# Altium PCB PERSEUS_PCB.PcbDoc
Units mm, origin at the board's own origin, x right, y up, seen from the top; angles counter-clockwise.
Board outline 152.4 x 101.6 mm, 2 copper layers (Top Layer, Bottom Layer); 178 components, 84 nets, 490 pads, 0 vias.
Unrouted connection lines stored in the file: 373.
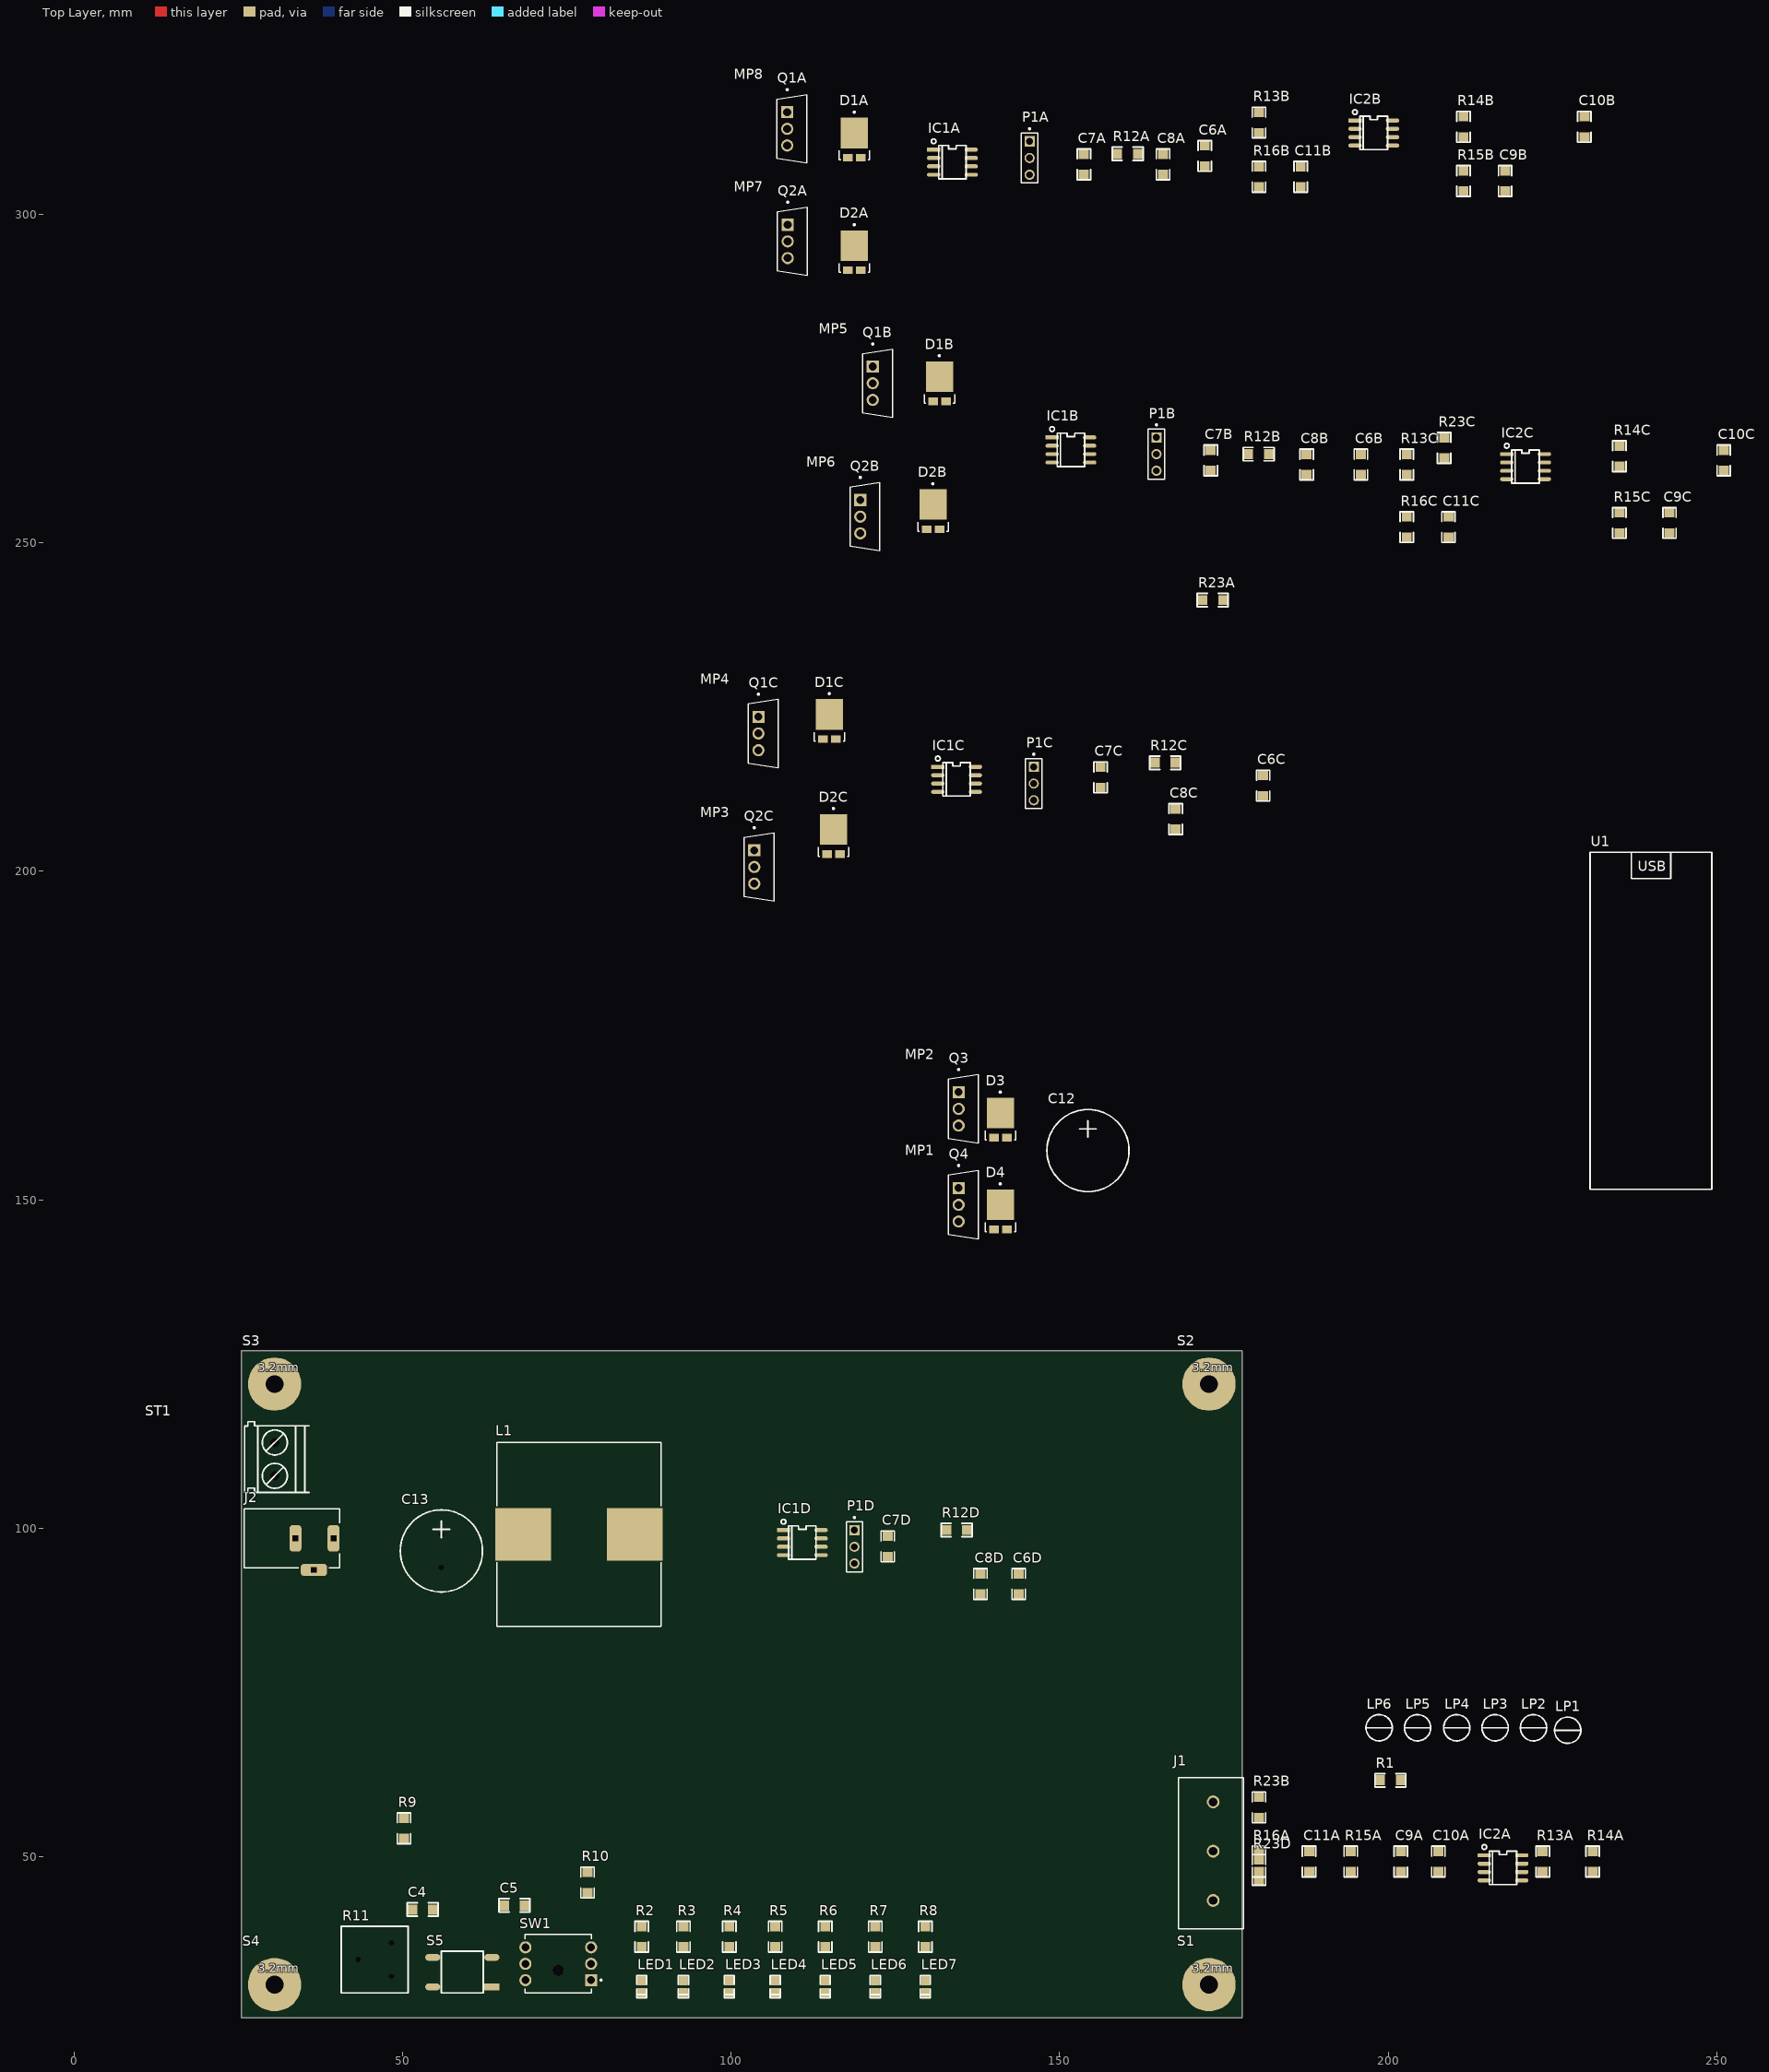
[diagram p0: Top Layer view]
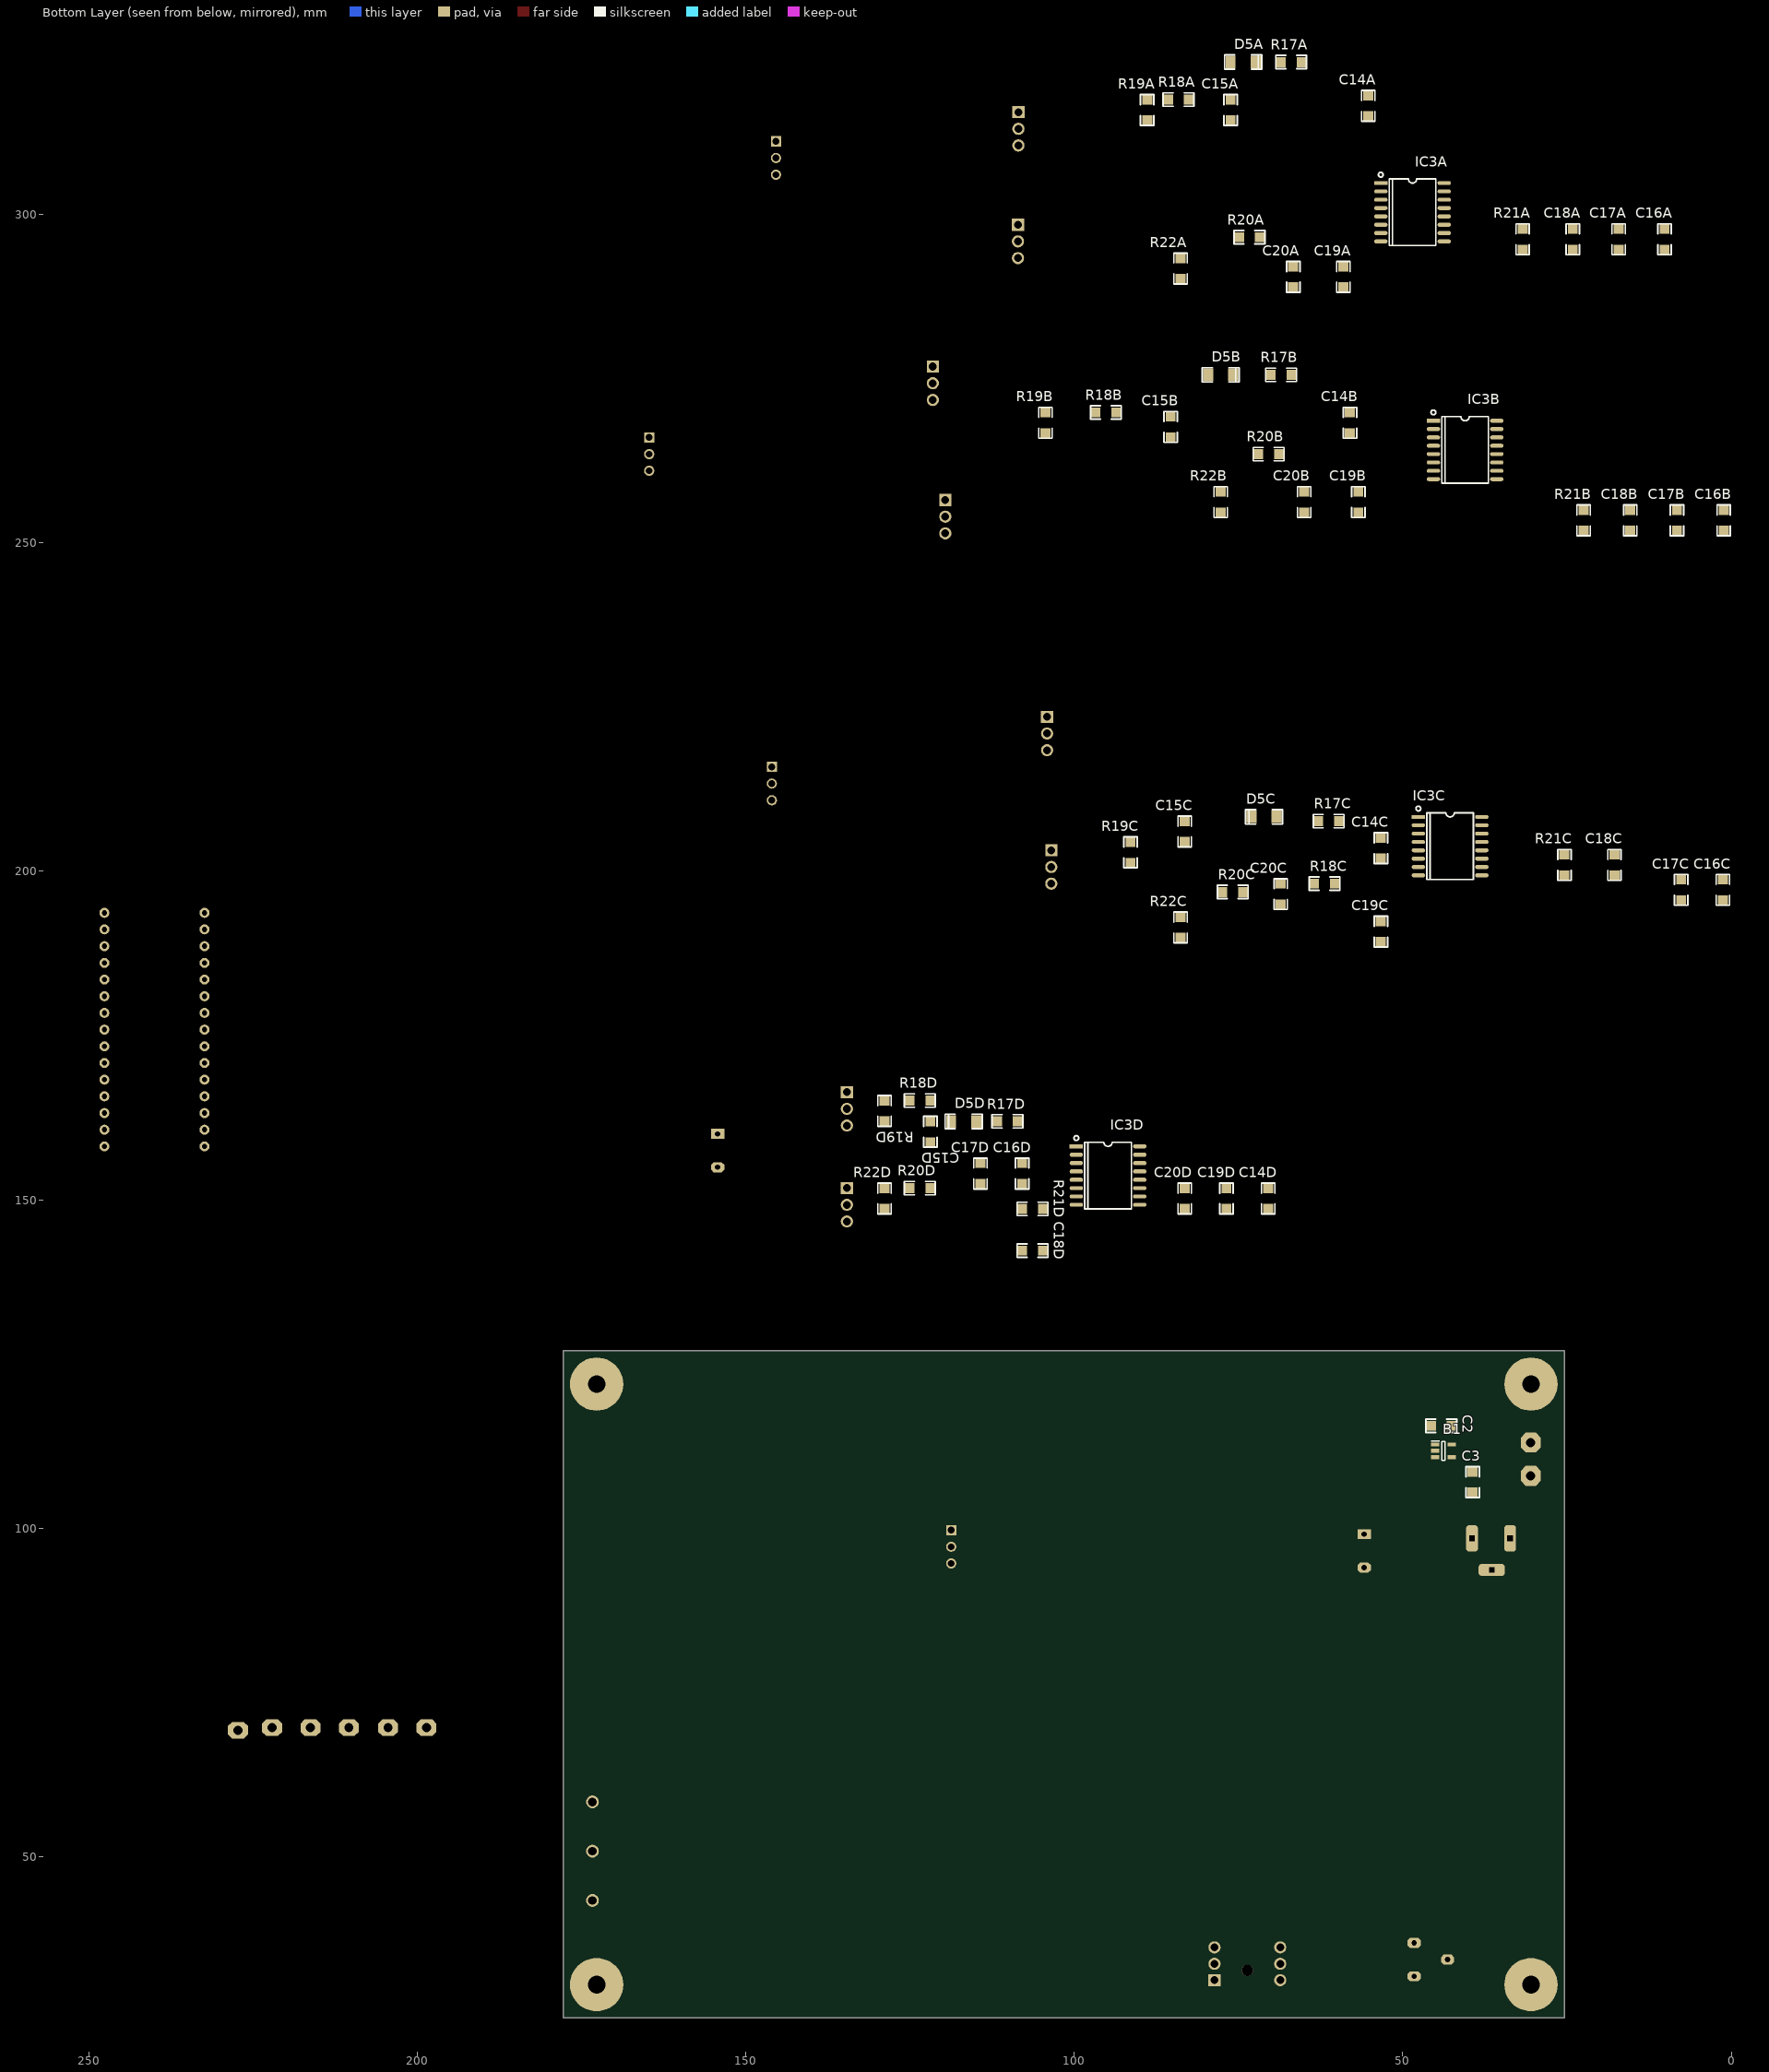
[diagram p1: Bottom Layer view, seen from below]

## Layer stack, top to bottom
Top Solder: solder mask 0.0102, Solder Resist, Dk 3.5
Top Layer: signal copper 0.0356
Dielectric 1: dielectric 0.32, FR-4, Dk 4.8
Bottom Layer: signal copper 0.0356
Bottom Solder: solder mask 0.0102, Solder Resist, Dk 3.5

## Board outline
25.4,25.4 177.8,25.4 177.8,127 25.4,127

## Design rules (kind name [scope] priority, off if disabled: settings)
Clearance [All] p1: gap=0.254 ignorepadtopadclearanceinfootprint=FALSE
ComponentClearance [All] p1 off: gap=0.254 collisioncheckmode=3 verticalgap=0.254 showdistances=FALSE
PolygonConnect [All] p1: connectstyle=Relief reliefconductorwidth=0.254 reliefentries=4 polygonreliefangle="90 Angle" airgapwidth=0.254
RoutingVias [All] p1: holewidth=0.711 width=1.27 viastyle="Through Hole" minholewidth=0.711 minwidth=1.27 maxholewidth=0.711 maxwidth=1.27
SolderMaskExpansion [All] p1: expansion=0.102 istentingtop=FALSE
SupplyNets "Schematic Supply Nets_3" [InNet('+3V3')] p1: voltage=0.000
SupplyNets "Schematic Supply Nets_2" [InNet('GNDA')] p2: voltage=0.000
SupplyNets "Schematic Supply Nets_1" [InNet('SGNDA')] p3: voltage=0.000
SupplyNets "Schematic Supply Nets" [InNet('Uin')] p4: voltage=0.000
Width [All] p1: maxlimit=0.254 minlimit=0.254 preferedwidth=0.254
29 further rules are at their usual default settings.

## Classes and differential pairs
component class U_SpannungssensorTP1: C9A C10A C11A IC2A R13A R14A R15A R16A
component class U_Mechanik: MP1 MP3 MP4 MP5 MP6 MP7 MP8 S1 S2 S3 S4
channel class StromsensorTP: U_StromsensorTP1 U_StromsensorTP2 U_StromsensorTP3 U_StromsensorTP4
channel class SpannungssensorTP: U_SpannungssensorTP1 U_SpannungssensorTP2 U_SpannungssensorTP3
channel class Halbbruecke: U_Halbbruecke1 U_Halbbruecke2 U_Halbbruecke3
channel class Gatetreiber: U_Gatetreiber1 U_Gatetreiber2 U_Gatetreiber3 U_Gatetreiber4
component class U_StromsensorTP4: C6D C7D C8D IC1D P1D R12D
component class U_StromsensorTP3: C6C C7C C8C IC1C P1C R12C
component class U_StromsensorTP2: C6B C7B C8B IC1B P1B R12B
component class U_StromsensorTP1: C6A C7A C8A IC1A P1A R12A
component class U_SpannungssensorTP3: C9C C10C C11C IC2C R13C R14C R15C R16C
component class U_SpannungssensorTP2: C9B C10B C11B IC2B R13B R14B R15B R16B
component class U_Hochsetzsteller: C12 C13 D3 D4 L1 Q3 Q4
component class U_Halbbruecke3: D1C D2C Q1C Q2C
component class U_Halbbruecke2: D1B D2B Q1B Q2B
component class U_Halbbruecke1: D1A D2A Q1A Q2A
component class U_Gatetreiber4: C14D C15D C16D C17D C18D C19D C20D D5D IC3D R17D R18D R19D R20D R21D R22D R23D
component class U_Gatetreiber3: C14C C15C C16C C17C C18C C19C C20C D5C IC3C R17C R18C R19C R20C R21C R22C R23C
component class U_Gatetreiber2: C14B C15B C16B C17B C18B C19B C20B D5B IC3B R17B R18B R19B R20B R21B R22B R23B
component class U_Gatetreiber1: C14A C15A C16A C17A C18A C19A C20A D5A IC3A R17A R18A R19A R20A R21A R22A R23A
component class PERSEUS: B1 C2 C3 C4 C5 J1 J2 LED1 LED2 LED3 LED4 LED5 LED6 LED7 LP1 LP2 LP3 LP4 LP5 LP6 R1 R2 R3 R4 R5 R6 R7 R8 R9 R10 R11 S5 ST1 SW1 U1

## Components (designator, comment, footprint, x,y, rotation, side; value= is the part's Value field where it differs from the comment)
B1 "3.3V LDO" SOT95P280X100-5N 43.815,111.76 r180 bottom
C2 "2.2u" 1206_C 45.72,115.57 r180 bottom
C3 "2.2u" 1206_C 39.37,108.585 r270 bottom
C4 "100n" 1206_C 54.61,41.91 r180 top
C5 "100n" 1206_C 68.58,42.545 r180 top
C6A "100n" 1206_C 172.085,307.34 r90 top (schematic designator C6)
C6B "100n" 1206_C 195.834,260.35 r90 top (schematic designator C6)
C6C "100n" 1206_C 180.975,211.455 r90 top (schematic designator C6)
C6D "100n" 1206_C 143.764,89.916 r90 top (schematic designator C6)
C7A "1n" 1206_C 153.67,306.07 r90 top (schematic designator C7)
C7B "1n" 1206_C 172.974,260.985 r90 top (schematic designator C7)
C7C "1n" 1206_C 156.21,212.725 r90 top (schematic designator C7)
C7D "1n" 1206_C 123.825,95.631 r90 top (schematic designator C7)
C8A "68n" 1206_C 165.735,306.07 r90 top (schematic designator C8)
C8B "68n" 1206_C 187.579,260.35 r90 top (schematic designator C8)
C8C "68n" 1206_C 167.64,206.375 r90 top (schematic designator C8)
C8D "68n" 1206_C 137.922,89.916 r90 top (schematic designator C8)
C9A "6n8" 1206_C 201.93,47.625 r90 top (schematic designator C9)
C9B "6n8" 1206_C 217.805,303.53 r90 top (schematic designator C9)
C9C "6n8" 1206_C 242.824,254.635 r270 top (schematic designator C9)
C10A "100n" 1206_C 207.645,47.625 r90 top (schematic designator C10)
C10B "100n" 1206_C 229.87,311.785 r90 top (schematic designator C10)
C10C "100n" 1206_C 251.079,260.985 r90 top (schematic designator C10)
C11A "6n8" 1206_C 187.96,47.625 r90 top (schematic designator C11)
C11B "6n8" 1206_C 186.69,304.165 r90 top (schematic designator C11)
C11C "6n8" 1206_C 209.169,250.825 r90 top (schematic designator C11)
C12 "47u" ELKO_5MM_D12.5MM 154.305,160.02 r270 top
C13 "47u" ELKO_5MM_D12.5MM 55.88,99.06 r270 top
C14A "1u" 1206_C 55.245,314.96 r90 bottom (schematic designator C14)
C14B "1u" 1206_C 58.039,266.7 r90 bottom (schematic designator C14)
C14C "1u" 1206_C 53.34,201.93 r90 bottom (schematic designator C14)
C14D "1u" 1206_C 70.485,148.59 r90 bottom (schematic designator C14)
C15A "470n" 1206_C 76.2,314.325 r90 bottom (schematic designator C15)
C15B "470n" 1206_C 85.344,266.065 r90 bottom (schematic designator C15)
C15C "470n" 1206_C 83.185,204.47 r90 bottom (schematic designator C15)
C15D "470n" 1206_C 121.92,158.75 r90 bottom (schematic designator C15)
C16A "1u" 1206_C 10.16,297.815 r270 bottom (schematic designator C16)
C16B "1u" 1206_C 1.143,251.841 r90 bottom (schematic designator C16)
C16C "1u" 1206_C 1.27,198.755 r270 bottom (schematic designator C16)
C16D "1u" 1206_C 107.95,152.4 r90 bottom (schematic designator C16)
C17A "100n" 1206_C 17.145,297.815 r270 bottom (schematic designator C17)
C17B "100n" 1206_C 8.255,251.841 r90 bottom (schematic designator C17)
C17C "100n" 1206_C 7.62,198.755 r270 bottom (schematic designator C17)
C17D "100n" 1206_C 114.3,152.4 r90 bottom (schematic designator C17)
C18A "100n" 1206_C 24.13,297.815 r270 bottom (schematic designator C18)
C18B "100n" 1206_C 15.367,251.841 r90 bottom (schematic designator C18)
C18C "100n" 1206_C 17.78,202.565 r270 bottom (schematic designator C18)
C18D "100n" 1206_C 107.95,142.24 r180 bottom (schematic designator C18)
C19A "100n" 1206_C 59.055,288.925 r90 bottom (schematic designator C19)
C19B "100n" 1206_C 56.769,254.635 r90 bottom (schematic designator C19)
C19C "100n" 1206_C 53.34,192.405 r270 bottom (schematic designator C19)
C19D "100n" 1206_C 76.835,148.59 r90 bottom (schematic designator C19)
C20A "10u" 1206_C 66.675,288.925 r90 bottom (schematic designator C20)
C20B "10u" 1206_C 65.024,254.635 r90 bottom (schematic designator C20)
C20C "10u" 1206_C 68.58,194.945 r90 bottom (schematic designator C20)
C20D "10u" 1206_C 83.185,148.59 r90 bottom (schematic designator C20)
D1A "FSV1060V" FP-340BQ-MFG 118.745,311.42 r270 top value=550pF (schematic designator D1)
D1B "FSV1060V" FP-340BQ-MFG 131.699,274.32 r270 top value=550pF (schematic designator D1)
D1C "FSV1060V" FP-340BQ-MFG 114.935,222.885 r270 top value=550pF (schematic designator D1)
D2A "FSV1060V" FP-340BQ-MFG 118.745,294.275 r270 top value=550pF (schematic designator D2)
D2B "FSV1060V" FP-340BQ-MFG 130.714,254.845 r270 top value=550pF (schematic designator D2)
D2C "FSV1060V" FP-340BQ-MFG 115.57,205.375 r270 top value=550pF (schematic designator D2)
D3 "FSV1060V" FP-340BQ-MFG 140.97,162.195 r270 top value=550pF
D4 "FSV1060V" FP-340BQ-MFG 140.97,148.225 r270 top value=550pF
D5A "LL4448" MINIMELF-SOD80 72.39,323.215 r0 bottom (schematic designator D5)
D5B "LL4448" MINIMELF-SOD80 75.819,275.59 r0 bottom (schematic designator D5)
D5C "LL4448" MINIMELF-SOD80 73.025,208.28 r180 bottom (schematic designator D5)
D5D "LL4448" MINIMELF-SOD80 118.745,161.925 r180 bottom (schematic designator D5)
IC1A "ACS722-10A" SO08_N 130.81,309.88 r0 top (schematic designator IC1)
IC1B "ACS722-10A" SO08_N 148.844,266.065 r0 top (schematic designator IC1)
IC1C "ACS722-10A" SO08_N 131.445,215.9 r0 top (schematic designator IC1)
IC1D "ACS722-10A" SO08_N 107.95,99.695 r0 top (schematic designator IC1)
IC2A "MCP6022-I/SN" SO08_N 214.63,50.165 r0 top (schematic designator IC2)
IC2B "MCP6022-I/SN" SO08_N 194.945,314.325 r0 top (schematic designator IC2)
IC2C "MCP6022-I/SN" SO08_N 218.059,263.525 r0 top (schematic designator IC2)
IC3A "Si8234AD-D-IS" SO16_W 53.34,304.8 r270 bottom (schematic designator IC3)
IC3B "Si8234AD-D-IS" SO16_W 45.339,268.605 r270 bottom (schematic designator IC3)
IC3C "Si8234AD-D-IS" SO16_W 47.625,208.28 r270 bottom (schematic designator IC3)
IC3D "Si8234AD-D-IS" SO16_W 99.695,158.115 r270 bottom (schematic designator IC3)
J1 "Phoenixklemme" Phoenix_3er 173.355,43.3 r90 top
J2 "DC Power Jack" 694106301002 33.105,98.425 r270 top
L1 "150 uH, 9 A" WE-HCF_2920_Litz 76.835,99.06 r90 top
LED1 "gn" 0805_DI_gr 86.36,29.21 r90 top
LED2 "gn" 0805_DI_gr 92.71,29.21 r90 top
LED3 "gn" 0805_DI_gr 99.695,29.21 r90 top
LED4 "gn" 0805_DI_gr 106.68,29.21 r90 top
LED5 "gn" 0805_DI_gr 114.3,29.21 r90 top
LED6 "gn" 0805_DI_gr 121.92,29.21 r90 top
LED7 "gn" 0805_DI_gr 129.54,29.21 r90 top
LP1 "GND" LP1 227.33,69.215 r0 top
LP2 "SGND" LP1 222.123,69.596 r0 top
LP3 "+3V3" LP1 216.281,69.596 r0 top
LP4 "Uin" LP1 210.439,69.596 r0 top
LP5 "Uzk" LP1 204.47,69.596 r0 top
LP6 "GND" LP1 198.628,69.596 r0 top
MP1 "T0-220 Cool" "TO-220 Cool" 135.89,149.225 r270 top
MP2 "T0-220 Cool" "TO-220 Cool" 135.89,163.83 r270 top
MP3 "T0-220 Cool" "TO-220 Cool" 104.775,200.66 r270 top
MP4 "T0-220 Cool" "TO-220 Cool" 104.775,220.98 r270 top
MP5 "T0-220 Cool" "TO-220 Cool" 122.809,274.32 r270 top
MP6 "T0-220 Cool" "TO-220 Cool" 120.904,254 r270 top
MP7 "T0-220 Cool" "TO-220 Cool" 109.855,295.91 r270 top
MP8 "T0-220 Cool" "TO-220 Cool" 109.855,313.055 r270 top
P1A "22-28-4033" MOLX-22-28-4033_V 145.415,308.61 r270 top (schematic designator P1)
P1B "22-28-4033" MOLX-22-28-4033_V 164.719,263.525 r270 top (schematic designator P1)
P1C "22-28-4033" MOLX-22-28-4033_V 146.05,213.36 r270 top (schematic designator P1)
P1D "22-28-4033" MOLX-22-28-4033_V 118.745,97.155 r270 top (schematic designator P1)
Q1A "CSD18532KCS" FP-PG-TO220-3-MFG 109.22,313.055 r0 top (schematic designator Q1)
Q1B "CSD18532KCS" FP-PG-TO220-3-MFG 122.244,274.32 r0 top (schematic designator Q1)
Q1C "CSD18532KCS" FP-PG-TO220-3-MFG 104.845,220.98 r0 top (schematic designator Q1)
Q2A "CSD18532KCS" FP-PG-TO220-3-MFG 109.29,295.91 r0 top (schematic designator Q2)
Q2B "CSD18532KCS" FP-PG-TO220-3-MFG 120.339,254 r0 top (schematic designator Q2)
Q2C "CSD18532KCS" FP-PG-TO220-3-MFG 104.21,200.66 r0 top (schematic designator Q2)
Q3 "CSD18532KCS" FP-PG-TO220-3-MFG 135.325,163.83 r0 top
Q4 "CSD18532KCS" FP-PG-TO220-3-MFG 135.325,149.225 r0 top
R1 "0R" 1206_R 198.755,61.595 r0 top
R2 "100R" 1206_R 86.36,36.195 r90 top
R3 "1k2" 1206_R 92.71,36.195 r90 top
R4 "2k2" 1206_R 99.695,36.195 r90 top
R5 "100R" 1206_R 106.68,36.195 r90 top
R6 "100R" 1206_R 114.3,36.195 r90 top
R7 "100R" 1206_R 121.92,36.195 r90 top
R8 "100R" 1206_R 129.54,36.195 r90 top
R9 "10k" 1206_R 50.165,52.705 r90 top
R10 "10k" 1206_R 78.105,44.45 r90 top
R11 "Poti" POT_T607_3D 45.72,34.29 r270 top
R12A "100R" 1206_R 158.75,309.245 r0 top (schematic designator R12)
R12B "100R" 1206_R 178.689,263.525 r0 top (schematic designator R12)
R12C "100R" 1206_R 164.465,216.535 r0 top (schematic designator R12)
R12D "100R" 1206_R 135.89,99.695 r180 top (schematic designator R12)
R13A "39k" 1206_R 223.52,47.625 r90 top (schematic designator R13)
R13B "39k" 1206_R 180.34,312.42 r90 top (schematic designator R13)
R13C "39k" 1206_R 202.819,263.525 r270 top (schematic designator R13)
R14A "39k" 1206_R 231.14,47.625 r90 top (schematic designator R14)
R14B "39k" 1206_R 211.455,311.785 r90 top (schematic designator R14)
R14C "39k" 1206_R 235.204,261.62 r90 top (schematic designator R14)
R15A "2k7" 1206_R 194.31,47.625 r90 top (schematic designator R15)
R15B "2k7" 1206_R 211.455,303.53 r90 top (schematic designator R15)
R15C "2k7" 1206_R 235.204,254.635 r270 top (schematic designator R15)
R16A "2k7" 1206_R 180.34,47.625 r90 top (schematic designator R16)
R16B "2k7" 1206_R 180.34,304.165 r90 top (schematic designator R16)
R16C "2k7" 1206_R 202.819,250.825 r90 top (schematic designator R16)
R17A "1R" 1206_R 68.58,323.215 r180 bottom (schematic designator R17)
R17B "1R" 1206_R 70.104,275.59 r180 bottom (schematic designator R17)
R17C "1R" 1206_R 62.865,207.645 r180 bottom (schematic designator R17)
R17D "1R" 1206_R 108.585,161.925 r0 bottom (schematic designator R17)
R18A "18R" 1206_R 85.725,317.5 r180 bottom (schematic designator R18)
R18B "18R" 1206_R 96.774,269.875 r180 bottom (schematic designator R18)
R18C "18R" 1206_R 63.5,198.12 r180 bottom (schematic designator R18)
R18D "18R" 1206_R 121.92,165.1 r0 bottom (schematic designator R18)
R19A "10k" 1206_R 88.9,317.5 r270 bottom (schematic designator R19)
R19B "10k" 1206_R 104.394,269.875 r270 bottom (schematic designator R19)
R19C "10k" 1206_R 91.44,204.47 r270 bottom (schematic designator R19)
R19D "10k" 1206_R 128.905,165.1 r270 bottom (schematic designator R19)
R20A "18R" 1206_R 74.93,296.545 r180 bottom (schematic designator R20)
R20B "18R" 1206_R 72.009,263.525 r180 bottom (schematic designator R20)
R20C "18R" 1206_R 77.47,196.85 r180 bottom (schematic designator R20)
R20D "18R" 1206_R 125.095,151.765 r180 bottom (schematic designator R20)
R21A "100k" 1206_R 31.75,297.815 r270 bottom (schematic designator R21)
R21B "100k" 1206_R 22.479,251.841 r90 bottom (schematic designator R21)
R21C "100k" 1206_R 25.4,202.565 r270 bottom (schematic designator R21)
R21D "100k" 1206_R 107.95,148.59 r180 bottom (schematic designator R21)
R22A "10k" 1206_R 83.82,290.195 r90 bottom (schematic designator R22)
R22B "10k" 1206_R 77.724,254.635 r90 bottom (schematic designator R22)
R22C "10k" 1206_R 83.82,189.865 r90 bottom (schematic designator R22)
R22D "10k" 1206_R 128.905,148.59 r90 bottom (schematic designator R22)
R23A "1R" 1206_R 174.879,241.3 r180 top (schematic designator R23)
R23B "1R" 1206_R 180.34,55.88 r90 top (schematic designator R23)
R23C "1R" 1206_R 208.534,262.89 r90 top (schematic designator R23)
R23D "1R" 1206_R 180.34,46.355 r90 top (schematic designator R23)
S1 "" M3 172.72,30.48 r0 top
S2 "" M3 172.72,121.92 r0 top
S3 "" M3 30.48,121.92 r0 top
S4 "" M3 30.48,30.48 r0 top
S5 "Taster" TASTERSMD_3D 54.555,30.135 r180 top
ST1 "Phoenix" "MKDS 1,5/ 2" 31.115,113.03 r270 top
SW1 "Druckschalter" FP-ESB-33133-MFG 73.66,33.655 r180 top
U1 "NUCLEO-G431KB" NUCLEO-G431KB 240.03,175.895 r270 top

## Footprints (in the part's own frame and the unit in brackets; to place one, negate y for a bottom-side part, rotate by r counter-clockwise, add the part's x,y. Pads: shape width x height; smd on the part's side, far side on the other; paste and mask are expansions set on the pad)
0805_DI_gr [mil] "Diode"
  rect 60x50 smd: 1(75,0) 2(0,0)
  silkscreen extent -30,-30 105,30, body extent -3,-25 77,25, height 43
1206_C [mil] "Passiv"
  rect 60x60 smd: 1(0,0) 2(125,0)
  silkscreen extent -30,-40 155,40, body extent -2,-33 128,33, height 53
1206_R [mil] "Passiv"
  rect 60x60 smd: 1(0,0) 2(125,0)
  silkscreen extent -30,-40 155,40, body extent -2,-33 128,33, height 26
694106301002 [mm] "DC Power Jack Right Angled(6.4)"
  rrect50% 4x1.8 hole 0.8 square: 1(0,6.35) 2(0,0.55)
  rrect50% 1.8x4 hole 0.8 square: 3(4.8,3.35)
  silkscreen extent -4.5,-7.25 4.5,7.25, body extent -4.5,-7.25 5,7.25, height 10.75
ELKO_5MM_D12.5MM [mil] "Kondensator"
  rect 1x1 / inner rect 60x80 / far side rect 60x80 hole 32: 1(0,0)
  oct 1x1 / inner oct 60x80 / far side oct 60x80 hole 32: 2(200,0)
  silkscreen extent -146,-246 346,246, body extent -148,-246 346,246, height 1478
FP-340BQ-MFG [mm]
  rect 1.15x1.45 smd paste+0 mask+0: 1(2.75,0.985) 2(2.75,-0.985)
  rect 4.65x4.15 smd paste+0 mask+0: 3(-1,0)
  silkscreen extent -4.3,-2.31 3.08,2.31, body extent -3.42,-2.41 3.42,2.41, height 0.25
FP-ESB-33133-MFG [mm]
  rect 1.85x1.85 hole 1.2 paste-2539.97 mask+0: 1(-5,2.5)
  round 1.85 hole 1.2 paste-2539.97 mask+0: 2(5,2.5) 3(-5,0) 4(5,0) 5(-5,-2.5) 6(5,-2.5)
  round 1.7 hole 1.7 unplated paste-2539.97 mask+0: ""(0,1)
  silkscreen extent -6.63,-4.45 5.07,4.45, body extent -6.02,-4.55 6.02,4.55, height 0.25
FP-PG-TO220-3-MFG [mm]
  rect 1.85x1.85 hole 1.2 paste-2539.97 mask+0: 1(-0.705,2.54)
  round 1.85 hole 1.2 paste-2539.97 mask+0: 2(-0.705,0) 3(-0.705,-2.54)
  silkscreen extent -2.27,-5.2 2.27,6.1, body extent -2.37,-5.55 2.37,5.55, height 0.25
LP1 [mil] "Sonstiges"
  oct 1x1 / inner oct 120x100 / far side oct 120x100 hole 55: 1(0,0)
  silkscreen extent -79,-79 79,79, body extent -59,-16 59,16, height 347
M3 [mil] "Sonstiges"
  round 320 hole 106: 1(0,0)
  Mechanical 10 keep-out circle w10: c0,0 r196.85
MINIMELF-SOD80 [mil] "Diode"
  rect 60x75 smd: 1(150,0) 2(0,0)
  silkscreen extent -36,-43 186,43, body extent 3,-30 149,32, height 63
"MKDS 1,5/ 2" [mil] "Phoenis-Anschlussklemme 2 pol., Pitch: 5,08mm"
  oct 1x1 / inner oct 120x120 / far side oct 120x120 hole 55: 1(0,-23.62) 2(200,-23.62)
  silkscreen extent -125,-205 300,181, body extent -125,-811 298,181, height 543
MOLX-22-28-4033_V [mm] "THD, 3-Leads, Body 7.62x2.49mm, Pitch 2.54mm"
  rect 1.55x1.55 hole 1.02: 1(-2.54,0)
  round 1.55 hole 1.02: 2(0,0) 3(2.54,0)
  silkscreen extent -4.58,-1.24 3.81,1.24, body extent -3.81,-1.24 3.81,1.24, height 8.38
NUCLEO-G431KB [mil]
  round 1 / inner round 60 / far side round 60 hole 32: 1(-700,-300) 2(-601.01,-300) 3(-500,-300) 4(-400,-300) 5(-300,-300) 6(-200,-300) 7(-100,-300) 8(0,-300) 9(100,-300) 10(200,-300) 11(300,-300) 12(400,-300) 13(500,-300) 14(600,-300) 15(700,-300) 16(700,300) 17(600,299.39) 18(500,300) 19(400,300) 20(300,300) 21(200,300) 22(100,300) 23(0,300) 24(-100,300) 25(-200,300) 26(-300,299.39) 27(-400,299.39) 28(-500,300) 29(-601.01,299.39) 30(-700,300)
  silkscreen extent -1063,-366 957,364, body extent -1063,-366 957,364, height 394
Phoenix_3er [mm]
  round 1.95 hole 1.3: 1(0,0) 2(7.5,0) 3(15,0)
  silkscreen extent -4.3,-4.6 18.72,5.25
POT_T607_3D [mil] "PCB Potenziometer mit Drehknopf"
  oct 1x1 / inner oct 60x80 / far side oct 60x80 hole 32: 1(100,100) 2(-100,100) W(0,-100)
  silkscreen extent -200,-200 200,200, body extent -188,-187 189,200, height 410
SO08_N [mil] "IC SOIC Narrow"
  rect 80x24 smd: 1(0,0)
  oval 80x24 smd: 2(0,-50) 3(0,-100) 4(0,-150) 5(225,-150) 6(225,-100) 7(225,-50) 8(225,0)
  silkscreen extent -14,-175 195,64, body extent -17,-171 225,21, height 69
SO16_W [mil] "IC SOIC Wide"
  rect 24x80 smd: 1(0,0)
  oval 24x80 smd: 2(50,0) 3(100,0) 4(150,0) 5(200,0) 6(250,0) 7(300,0) 8(350,0) 9(350,380) 10(300,380) 11(250,380) 12(200,380) 13(150,380) 14(100,380) 15(50,380) 16(0,380)
  silkscreen extent -64,-14 375,330, body extent -27,-12 377,393, height 100
SOT95P280X100-5N [mm]
  rect 1.25x0.6 smd: 1(-1.25,0.95) 2(-1.25,0) 3(-1.25,-0.95) 4(1.25,-0.95) 5(1.25,0.95)
  silkscreen extent -1.88,-1.45 0.28,1.5
TASTERSMD_3D [mil] "Schalter"
  round 120 on Top Overlay: 0(-177.17,-88.58)
  rect 90x40 smd: 1(-354.33,0)
  oval 90x40 smd: 1(0,0) 2(-354.33,-177.17) 2(0,-177.17)
  silkscreen extent -302,-214 -52,36, body extent -357,-206 -3,30, height 170
"TO-220 Cool" [mm] "FP-577202B00000G-MFG"
  body extent -6.6,-9.53 6.6,3.18, height 22.22
WE-HCF_2920_Litz [mm] "SMD High Current Inductor, body 28x25mm"
  rect 8x8.5 smd: 1(0,8.5) 2(0,-8.5)
  silkscreen extent -14,-12.5 14,12.5, body extent -13.65,-11.55 13.65,11.55, height 20.1

## Part data
B1: library part Spannungsregler, "40V, 200mA, Low Noise, CMOS LDO Linear Regulator, ADPL44002AUJZ-3.3-R7", Manufacturer_Name="Analog Devices", Manufacturer_Part_Number=ADPL44002AUJZ-3.3-R7, Mouser Part Number=584-PL44002AUJZ33R7, Datasheet Link=https://www.analog.com/ADPL44002/datasheet, Geometry.Height=1mm, Mouser Price/Stock=https://www.mouser.co.uk/ProductDetail/Analog-Devices/ADPL44002AUJZ-3.3-R7?qs=%252BXxaIXUDbq3bLG2Aqffs8Q%3D%3D
C2 C3: library part CAP, "Min 2.2uF"
C4 C5 C6A C6B C6C C6D C7A C7B C7C C7D C8A C8B C8C C8D C9A C9B C9C C10A C10B C10C C11A C11B C11C C14A C14B C14C C14D C15A C15B C15C C15D C16A C16B C16C C16D C17A C17B C17C C17D C18A C18B C18C C18D C19A C19B C19C C19D C20A C20B C20C C20D: library part CAP, "Kondensator (ohne Polarität)"
C12 C13: library part ELKO_THT, "Kondensator Elektrolyt"
D1A D1B D1C D2A D2B D2C D3 D4: library part CMP-07162-000018-1, "DIODE SCHOTTKY 60V 10A TO277-3", Capacitance=550pF, Forward Current=10A, Manufacturer="ON Semiconductor", Max Junction Temp=+150°C, Max Repetitive Reverse Voltage=60V, Max Surge Forward Current=280A, Package=340BQ, Peak Reverse Current=0.056mA, Temperature="-55°C to +150°C", Temperature Range Low=-55°C, Automotive=No, Category=Diode, ComponentLink2Description=Datasheet, ComponentLink2URL=https://www.onsemi.com/pub/Collateral/FSV1060V-D.pdf, Device Class L1="Discrete Semiconductors", Device Class L2=Diodes, Device Class L3="Schottky Diodes", Digikey Description="DIODE SCHOTTKY 60V 10A TO277-3", Footprint Url=https://www.onsemi.com/pub/Collateral/340BQ.PDF, Height=1.2mm, Lead Free=Yes, Manufacturer Part Number=FSV1060V, Mouser Description="Schottky Diodes & Rectifiers Schottky", Octopart=https://octopart.com/fsv1060v-on+semiconductor-84328651, Reverse Voltage=60V, RoHS=TRUE, Temperature Range High=+150°C
D5A D5B D5C D5D: library part DIODE, "Diode (z.B. 1N4448)"
IC1A IC1B IC1C IC1D: library part "Current Sensor ACS722", ComponentLink1Description=Datasheet, ComponentLink1URL=https://ebs.eti.kit.edu/files/ebs_uploads/20170616-1458_Datenblatt_ACS722LLCTR-10AB-T.pdf
IC3A IC3B IC3C IC3D: "Gate-Treiber 5 kV 5 V UVLO HS/LS isolated gate driver with PWM input, deadtime with external resistor", EBS_Nummer=8717, HelpURL=https://ebs.eti.kit.edu/Artikel/Detailansicht/8717
J1: library part Leiterbahnklemme, "Phoenix: Fixed Terminal Blocks 3P 7.5mm GMKDS 1,5/ 3", Arrow Part Number=1717033, Manufacturer_Name="Phoenix Contact", Mouser Part Number=651-1717033, Arrow Price/Stock=https://www.arrow.com/en/products/1717033/phoenix-contact?utm_currency=USD&region=nac, Datasheet Link=https://media.digikey.com/pdf/Data%20Sheets/Phoenix%20Contact%20PDFs/1717033.pdf, Geometry.Height=13.9mm, Manufacturer_Part_Number=1717033, Mouser Price/Stock=https://www.mouser.co.uk/ProductDetail/Phoenix-Contact/1717033?qs=aYsvlkyO7qPHPfcN%252B81Plg%3D%3D
J2: library part CMP-1502-00188-2, Color=Black, Current Rating=5A, Flammability Rating="UL94 V-0", Insulation Resistance=100MΩ, Max Operating Temperature=85°C, Min Operating Temperature=-40°C, Operating Supply Voltage=24V, Voltage Rating (DC)=20V, Connector Type=Power, Contact Gender=Female, Contact Material="Gold, Tin", Contact Plating=Tin, Gender=Male, Height=11mm, Housing Material=Polyamide, Mount="Through Hole", NexarPartId=52676100, Number of Contacts=3, Packaging=Bulk, REACH SVHC=Unknown, RoHS=Compliant, Shielding=Unshielded, Termination="Through Hole", Voltage Rating=24V
L1: library part "Induktivitaet SMD", "SMT High Current Inductor WE-HCF, size 2920, 150 uH, 8.4 A", DC Resistance max.="42.74 mOhm", Inductance="150 uH", Operating Temperature="-40 to 125 degC", Part Number=74437429203151, Rated Current="8.4 A", Saturation Current="7.8 A", Self Resonant Frequency="3.8 MHz", ComponentLink1Description=Manufacturer, ComponentLink1URL=http://www.we-online.de, ComponentLink2Description=Datasheet, ComponentLink2URL=https://katalog.we-online.de/pbs/datasheet/74437429203151.pdf, Mounting Technology=SMT, Packaging="Tape and Reel", Published Date="November 2018", Publisher="Wurth Elektronik", Size=2920
LED1 LED2 LED3 LED4 LED5 LED6 LED7: library part "LED SMD 0805", "LED SMD 0805 (gruen)"
LP1 LP2 LP3 LP4 LP5 LP6: library part LP
MP1 MP2 MP3 MP4 MP5 MP6 MP7 MP8: library part "Kuehlkoerper TO-220", "HEAT SINK TO-220 .500\" COMPACT 577202B00000G", Case/Package=TO-220, Color=Black, Natural Thermal Resistance=24.4°C/W, Package Quantity=2000, Thermal Resistance @ Forced Air Flow (100 LFM)=10°C/W, Depth=13.21mm, Finish=Anodized, Height=12.7mm, Height Off Base=0.5inch, Lead Free="Lead Free", Length=19.05mm, Material=Aluminium, Mount=Bolt, Package Cooled=TO-220, Packaging=Bulk, Radiation Hardening=No, REACH SVHC="No SVHC", RoHS Compliant=Yes, Shape=Fins, Type=Passive, Weight=0.25lb, Width=0.52inch
P1A P1B P1C P1D: library part CMP-1676-00001-5, "Stiftleiste 3 fach, Male Header, Pitch 2.54 mm, 1 x 3 Position, Height 8.38 mm, Tail Length 3.18 mm, RoHS, Bulk", Colour=Black, Current Rating="4 A", Manufacturer=Molex, Max Operating Temperature="75 degC", Min Operating Temperature="0 degC", Package Quantity=1, Voltage Rating="250 V", ComponentLink1Description="Manufacturer URL", ComponentLink1URL=http://www.molex.com/, ComponentLink2Description=Datasheet, ComponentLink2URL=http://www.molex.com/pdm_docs/sd/022284033_sd.pdf, Contact Finish=Gold, Contact Material=Brass, Contact Plating=Gold, DatasheetVersion="Rev. G, 01/2012", Height="8.38 mm", Lead Pitch="0.1 inch", Length="7.62 mm", Mount="Through Hole", Mounting Technology="Through Hole", PackageDescription="Male Header, Pitch 2.54 mm, 1 x 3 Position, Height 8.38 mm, Tail Length 3.18 mm", PackageReference=22-28-4033, Packaging=Bulk, Pins=3, REACH SVHC=Unknown, RoHSCompliant=true, Rows=1
Q1A Q1B Q1C Q2A Q2B Q2C Q3 Q4: library part CMP-32901-001154-1, "MOSFET N-CH 60V 100A TO220", Case/Package=TO-220, Continuous Drain Current (ID)=55A, Drain to Source Breakdown Voltage=60V, Drain to Source Resistance=16.5mR, Gate to Source Voltage (Vgs)=20V, Input Capacitance=1.812nF, Max Operating Temperature=175°C, Max Power Dissipation=115W, Min Operating Temperature=-55°C, Threshold Voltage=4V, Drain to Source Voltage (Vdss)=60V, Element Configuration=Single, Halogen Free="Halogen Free", Height=0.65inch, Lead Free="Lead Free", Length=0.42inch, Max Dual Supply Voltage=60V, Mount="Through Hole", Number of Pins=3, Packaging=Rail/Tube, Polarization=N, Power Dissipation=115W, Rds On Max=16.5mR, Reach SVHC Compliant=Yes, RoHS Compliant=Yes, Series=HEXFET®, Turn-Off Delay Time=40ns, Turn-On Delay Time=13ns, Width=0.19inch
R1 R2 R7 R8: library part WIDERSTAND, "LED Vorwiderstand: Min 65 Ohm, Berechnet für 3.3V, 2V Spannungsabfall, 20mA Strom"
R3 R9 R10: library part WIDERSTAND, "LED Vorwiderstand: Min 1.4 kOhm Berechnet für 30V Uin und 2 V Spannungsabfall und If=20mA"
R4 R5 R6 R12A R12B R12C R12D R13A R13B R13C R14A R14B R14C R15A R15B R15C R16A R16B R16C R17A R17B R17C R17D R18A R18B R18C R18D R19A R19B R19C R19D R20A R20B R20C R20D R21A R21B R21C R21D R22A R22B R22C R22D R23A R23B R23C R23D: library part WIDERSTAND, "Widerstand"
R11: library part POT, "Widerstand"
S1 S2 S3 S4: library part SCHRAUBE/BOLZEN
S5: library part TASTER-SMD
ST1: library part CONN02, "Phönix-Klemme"
SW1: library part CMP-05613-000004-1, "SWITCH PUSH DPDT 0.2A 14V", Contact Current Rating=200mA, Max Operating Temperature=80°C, Min Operating Temperature=-30°C, Package Quantity=100, Voltage Rating (DC)=14V, Actuator Type=Lever, Contact Plating=Silver, Current Rating=200mA, Lead Free="Lead Free", Length=10mm, Mount="Through Hole", Orientation=Vertical, Packaging=Bulk, Radiation Hardening=No, REACH SVHC="No SVHC", RoHS Compliant=Yes, Series=ESB33, Switch Function=On-On, Termination="PC Pin", Throw Configuration=DPDT, Width=10mm

## Nets (pads, with @x,y where several pads share a name; then routed paths per layer and width w, separated by ;. In a path a pad name is that pad's centre, name@x,y a point inside that pad or via, vN(x,y) a via of type N, cw(c..) or ccw(c..) an arc to the next point about the centre after c; other vN are vias at no path point)
+3V3: B1.4 B1.5 C2.2 C6A.2 C6B.2 C6C.2 C6D.2 C10A.2 C10B.2 C10C.2 C16A.2 C16B.2 C16C.2 C16D.2 C17A.2 C17B.2 C17C.2 C17D.2 IC1A.8 IC1B.8 IC1C.8 IC1D.8 IC2A.8 IC2B.8 IC2C.8 IC3A.3 IC3A.8 IC3B.3 IC3B.8 IC3C.3 IC3C.8 IC3D.3 IC3D.8 LP3.1 P1A.1 P1B.1 P1C.1 P1D.1 R2.2 R9.2 R10.2 SW1.1 SW1.2 U1.17
AD_Poti: C4.2 R9.1 R11.2 U1.22
AD_U_HBA: IC2B.1 IC2B.2
AD_U_HBB: IC2A.1 IC2A.2
AD_U_HBC: IC2A.6 IC2A.7 U1.16
AD_Uin: IC2C.1 IC2C.2 U1.14
AD_Uzk: IC2C.6 IC2C.7 U1.15
GateEnable_A: IC3C.5 R6.2 U1.7
GateEnable_B: IC3B.5 R7.2 U1.10
GateEnable_C: IC3A.5 R8.2 U1.13
GateEnable_HSS: IC3D.5 R5.2 SW1.4
GNDA: C12.2 C13.2 C14A.1 C14B.1 C14C.1 C14D.1 C15A.2 C15B.2 C15C.2 C15D.2 C19A.1 C19B.1 C19C.1 C19D.1 C20A.1 C20B.1 C20C.1 C20D.1 D2A.1 D2A.2 D2B.1 D2B.2 D2C.1 D2C.2 D5A.2 D5B.2 D5C.2 D5D.2 IC1D.3 IC1D.4 IC3A.9 IC3A.16 IC3B.9 IC3B.16 IC3C.9 IC3C.16 IC3D.9 IC3D.16 LP1.1 LP6.1 Q2A.3 Q2B.3 Q2C.3 R1.1 R22A.1 R22B.1 R22C.1 R22D.1
HB_A_AC: IC1C.3 IC1C.4 J1.1 R13B.2 U1.24
HB_B_AC: IC1B.3 IC1B.4 J1.2 R13A.2 U1.23
HB_C_AC: IC1A.3 IC1A.4 J1.3 R14A.2
I_PhaseA: C8C.2 R12C.2 U1.20
I_PhaseB: C8B.2 R12B.2 U1.26
I_PhaseC: C8A.2 R12A.2 U1.21
NetB1_1: B1.1 ST1.1
NetB1_2: B1.2 C2.1 C3.1 J2.2 J2.3 ST1.2
NetC7A_2: C7A.2 IC1A.7 R12A.1
NetC7B_2: C7B.2 IC1B.7 R12B.1
NetC7C_2: C7C.2 IC1C.7 R12C.1
NetC7D_2: C7D.2 IC1D.7 R12D.1
NetC9A_2: C9A.2 IC2A.5 R14A.1 R15A.2
NetC9B_2: C9B.2 IC2B.5 R14B.1 R15B.2
NetC9C_2: C9C.2 IC2C.5 R14C.1 R15C.2
NetC11A_2: C11A.2 IC2A.3 R13A.1 R16A.2
NetC11B_2: C11B.2 IC2B.3 R13B.1 R16B.2
NetC11C_2: C11C.2 IC2C.3 R13C.1 R16C.2
NetC15A_1: C15A.1 IC1A.1 IC1A.2 IC3A.14 R19A.2
NetC15B_1: C15B.1 IC1B.1 IC1B.2 IC3B.14 R19B.2
NetC15C_1: C15C.1 IC1C.1 IC1C.2 IC3C.14 R19C.2
NetC15D_1: C15D.1 D3.1 D3.2 D4.3 IC3D.14 L1.2 Q3.3 Q4.2 R19D.2
NetC18A_2: C18A.2 IC3A.6 R21A.2
NetC18B_2: C18B.2 IC3B.6 R21B.2
NetC18C_2: C18C.2 IC3C.6 R21C.2
NetC18D_2: C18D.2 IC3D.6 R21D.2
NetD1A_1: D1A.1 D1A.2 D2A.3 Q1A.3 Q2A.2
NetD1B_1: D1B.1 D1B.2 D2B.3 Q1B.3 Q2B.2
NetD1C_1: D1C.1 D1C.2 D2C.3 Q1C.3 Q2C.2
NetD4_1: D4.1 D4.2 IC1D.1 IC1D.2 Q4.3
NetD5A_1: D5A.1 R17A.2 R23A.2
NetD5B_1: D5B.1 R17B.2 R23B.2
NetD5C_1: D5C.1 R17C.2 R23C.2
NetD5D_1: D5D.1 R17D.2 R23D.2
NetIC1A_6: IC1A.6 P1A.2
NetIC1B_6: IC1B.6 P1B.2
NetIC1C_6: IC1C.6 P1C.2
NetIC1D_6: IC1D.6 P1D.2
NetIC2B_6: IC2B.6 IC2B.7
NetIC3A_10: IC3A.10 R20A.1
NetIC3A_15: IC3A.15 R18A.1
NetIC3B_10: IC3B.10 R20B.1
NetIC3B_15: IC3B.15 R18B.1
NetIC3C_10: IC3C.10 R20C.1
NetIC3C_15: IC3C.15 R18C.1
NetIC3D_10: IC3D.10 R20D.1
NetIC3D_15: IC3D.15 R18D.1
NetLED1_1: LED1.1 R2.1
NetLED2_1: LED2.1 R3.1
NetLED3_1: LED3.1 R4.1
NetLED4_1: LED4.1 R5.1
NetLED5_1: LED5.1 R6.1
NetLED6_1: LED6.1 R7.1
NetLED7_1: LED7.1 R8.1
NetQ1A_1: Q1A.1 R18A.2 R19A.1
NetQ1B_1: Q1B.1 R18B.2 R19B.1
NetQ1C_1: Q1C.1 R18C.2 R19C.1
NetQ2A_1: Q2A.1 R20A.2 R22A.2
NetQ2B_1: Q2B.1 R20B.2 R22B.2
NetQ2C_1: Q2C.1 R20C.2 R22C.2
NetQ3_1: Q3.1 R18D.2 R19D.1
NetQ4_1: Q4.1 R20D.2 R22D.2
NetR14B_2: R14B.2
PWM_A: IC3C.1 U1.9
PWM_B: IC3B.1 U1.6
PWM_C: IC3A.1 U1.12
PWM_HSS: IC3D.1 U1.8
SGNDA: C4.1 C5.1 C6A.1 C6B.1 C6C.1 C6D.1 C7A.1 C7B.1 C7C.1 C7D.1 C8A.1 C8B.1 C8C.1 C8D.1 C9A.1 C9B.1 C9C.1 C10A.1 C10B.1 C10C.1 C11A.1 C11B.1 C11C.1 C16A.1 C16B.1 C16C.1 C16D.1 C17A.1 C17B.1 C17C.1 C17D.1 C18A.1 C18B.1 C18C.1 C18D.1 IC1A.5 IC1B.5 IC1C.5 IC1D.5 IC2A.4 IC2B.4 IC2C.4 IC3A.4 IC3B.4 IC3C.4 IC3D.4 LED1.2 LED2.2 LED3.2 LED4.2 LED5.2 LED6.2 LED7.2 LP2.1 P1A.3 P1B.3 P1C.3 P1D.3 R1.2 R11.1 R15A.1 R15B.1 R15C.1 R16A.1 R16B.1 R16C.1 R21A.1 R21B.1 R21C.1 R21D.1 S5.2 SW1.5 SW1.6 U1.4 U1.29
Taster: C5.2 R10.1 S5.1 U1.25
U_I_HSS: C8D.2 R12D.2 U1.19
Uin: B1.3 C3.2 C13.1 C14A.2 C14B.2 C14C.2 C14D.2 C19A.2 C19B.2 C19C.2 C19D.2 C20A.2 C20B.2 C20C.2 C20D.2 IC3A.11 IC3B.11 IC3C.11 IC3D.11 J2.1 L1.1 LP4.1 R3.2 R13C.2 R17A.1 R17B.1 R17C.1 R17D.1 R23A.1 R23B.1 R23C.1 R23D.1
Uzk: C12.1 D1A.3 D1B.3 D1C.3 D3.3 LP5.1 Q1A.2 Q1B.2 Q1C.2 Q3.2 R4.2 R14C.2
pads on no net: IC3A.2 IC3A.7 IC3A.12 IC3A.13 IC3B.2 IC3B.7 IC3B.12 IC3B.13 IC3C.2 IC3C.7 IC3C.12 IC3C.13 IC3D.2 IC3D.7 IC3D.12 IC3D.13 R11.W S1.1 S2.1 S3.1 S4.1 S5.0 SW1. SW1.3 U1.1 U1.2 U1.3 U1.5 U1.11 U1.18 U1.27 U1.28 U1.30

## Text inside footprints (layer, text, board x,y; h text height)
S1: Top Overlay "3.2mm" at 170.18,32.385 h1.27
S2: Top Overlay "3.2mm" at 170.18,123.825 h1.27
S3: Top Overlay "3.2mm" at 27.94,123.825 h1.27
S4: Top Overlay "3.2mm" at 27.94,32.385 h1.27
U1: Top Overlay "USB" at 237.984,200.049 h1.52